# Altium PCB AMA4B_Core_board.PcbDoc (part 3 of 3)
Units mm, origin at the board's own origin, x right, y up, seen from the top; angles counter-clockwise.
Board outline 16 x 22 mm, 4 copper layers (TOP, LY2 - GND, LY3 - GND, BOTTOM), stack 0.771 mm thick; 43 components, 117 nets, 318 pads, 236 vias.
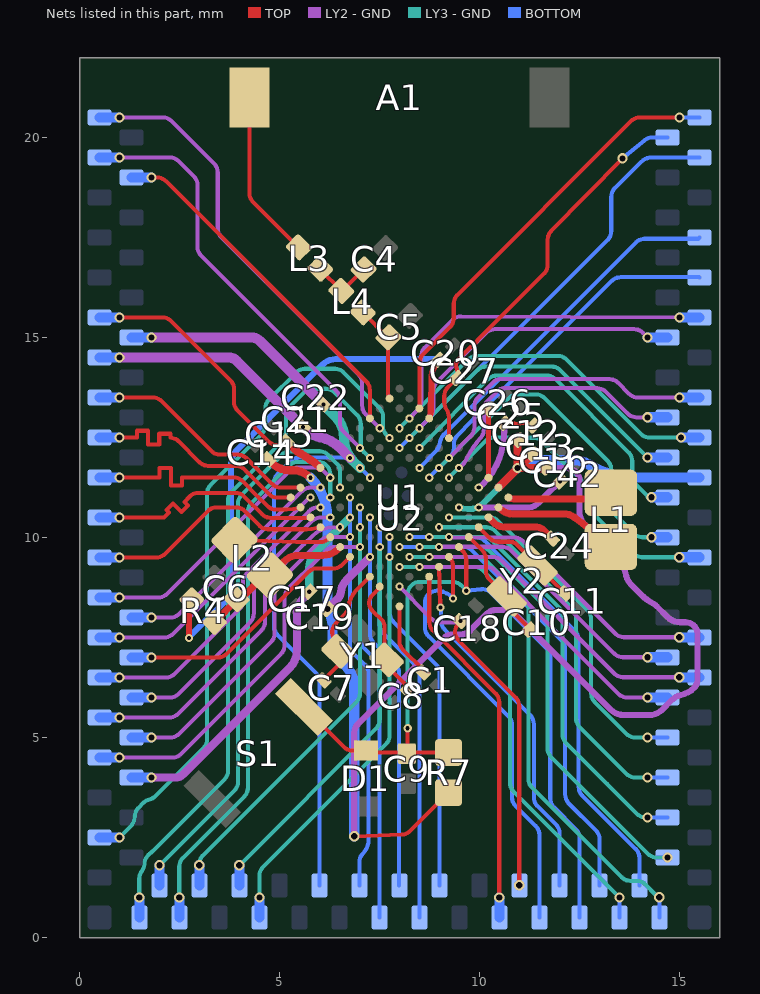
[diagram p4: the nets of this part, all layers, seen from the top]

## Via types
v1: diameter 0.254, hole 0.152, TOP to BOTTOM, tented both sides, 84 vias
v2: diameter 0.203, hole 0.102, TOP to BOTTOM, tented both sides, 84 vias
v3: diameter 0.203, hole 0.102, TOP to LY2 - GND, tented both sides, 40 vias
v4: diameter 0.203, hole 0.102, TOP to LY3 - GND, tented both sides, 28 vias

## Nets (pads, with @x,y where several pads share a name; then routed paths per layer and width w, separated by ;. In a path a pad name is that pad's centre, name@x,y a point inside that pad or via, vN(x,y) a via of type N, cw(c..) or ccw(c..) an arc to the next point about the centre after c; other vN are vias at no path point) (continued)
M6SCL_M6SCK_I2S1CK_TX23_GP61: U1.K6 U2.66 | length 17.5
  LY3 - GND w0.102: v1(1.494,1) 1.494,1.472 cw(c1.799,1.472) 1.54,1.634 1.574,1.689 ccw(c1.315,1.849) 1.619,1.829 cw(c2,1.806) 1.73,2.075 cw(c2,1.806) 1.769,2.109 ccw(c1.584,2.351) 1.796,2.133 1.799,2.135 cw(c2.011,1.917) 1.814,2.149 ccw(c1.471,2.558) 1.848,2.18 3.622,3.954 ccw(c3.406,4.169) 3.711,4.169 3.711,10.921 cw(c4.016,10.919) 3.799,11.134 4.973,12.308 ccw(c4.596,12.685) 5.026,12.369 cw(c5.27,12.187) 5.054,12.402 5.068,12.416 ccw(c4.852,12.631) 5.157,12.631 5.157,13.05 cw(c5.462,13.049) 5.246,13.265 5.611,13.629 cw(c5.826,13.414) 5.826,13.719 6.156,13.719 cw(c6.156,13.414) 6.372,13.629 6.714,13.287 6.941,13.06 cw(c6.725,12.845) 7.03,12.845 7.03,12.344 ccw(c7.335,12.344) 7.119,12.128 v4(7.258,11.99)
  BOTTOM w0.254: v1(1.494,1) 1.497,0.997 1.497,0.503 U2.66@1.5,0.5
M6SDA_M6MOSI_I2S1DAT_RX01_I2S1DOUT_GP62: U1.L6 U2.104 | length 11
  LY2 - GND w0.102: v1(1,19.5) 2.26,19.5 cw(c2.26,19.195) 2.476,19.41 2.86,19.027 cw(c2.644,18.811) 2.949,18.811 2.949,17.263 ccw(c3.254,17.263) 3.038,17.047 6.42,13.666 cw(c6.204,13.451) 6.509,13.451 6.509,13.082 6.509,12.865 ccw(c6.814,12.865) 6.598,12.649 v3(7.01,12.237)
  BOTTOM w0.254: U2.104@0.5,19.5 v1(1,19.5)
M7MISO_SWO_RTS01_GP24: U1.E2 U2.15 | length 6.8
  LY2 - GND w0.102: v3(9.485,11.742) ccw(c9.216,12.168) 9.654,11.919 ccw(c9.389,12.07) 9.671,11.954 9.68,11.977 cw(c9.962,11.861) 9.691,12.001 cw(c11.752,10.924) 9.833,12.238 cw(c12.653,10.307) 10.037,12.505 ccw(c9.803,12.701) 10.096,12.617 ccw(c9.803,12.701) 10.107,12.701 10.107,13.193 cw(c10.412,13.196) 10.197,13.412 10.436,13.651 cw(c10.65,13.434) 10.65,13.739 10.903,13.739 cw(c10.904,13.434) 10.906,13.739 12.943,13.732 cw(c12.942,13.427) 13.157,13.643 13.707,13.094 ccw(c13.922,13.31) 13.92,13.005 v1(14.2,13.005)
  BOTTOM w0.254: v1@14.205,13.005 14.695,13.005 U2.15@14.7,13
M7SCL_M7SCK_SWO_RX01_GP22: U1.F3 U2.21 | length 8.5
  LY3 - GND w0.102: v4(8.99,11.742) 10.734,13.486 cw(c10.95,13.27) 10.95,13.576 11.411,13.576 cw(c11.411,13.27) 11.628,13.486 13.206,11.908 cw(c12.99,11.693) 13.295,11.689 13.295,11.671 ccw(c13.599,11.668) 13.295,11.669 13.295,10.784 ccw(c13.599,10.786) 13.383,10.571 13.859,10.095 ccw(c14.074,10.311) 14.074,10.006 v1@14.2,10.006
  BOTTOM w0.254: v1(14.3,10.006) 14.694,10.006 U2.21@14.7,10
M7SDA_M7MOSI_SWO_RX23_GP23: U1.F2 U2.14 | length 7.7
  LY2 - GND w0.102: v3(9.237,11.99) 9.78,12.532 ccw(c9.564,12.748) 9.869,12.748 9.869,12.843 9.869,13.281 cw(c10.174,13.281) 9.958,13.497 10.34,13.879 cw(c10.556,13.663) 10.556,13.968 10.903,13.968 ; 10.904,13.968 13.248,13.96 cw(c13.247,13.655) 13.463,13.87 13.743,13.59 ccw(c13.957,13.807) 13.956,13.502 14.527,13.502 v1@14.998,13.501
  BOTTOM w0.254: v1(15,13.5) U2.14@15.5,13.5
MIPI_CLK.MIPI_N: U1.J12 U2.84 | length 6.2
  TOP w0.102: v1(1,9.5) 1.918,9.5 ccw(c1.918,9.805) 2.133,9.589 3.207,10.663 cw(c3.422,10.447) 3.422,10.752 3.916,10.752 cw(c3.916,10.447) 4.131,10.663 4.499,10.295 ccw(c4.714,10.511) 4.714,10.206 5.221,10.206 5.669,10.206 ccw(c5.671,11.409) 5.922,10.233 5.968,10.242 ccw(c5.907,10.541) U1.J12@6.02,10.258
  BOTTOM w0.254: U2.84@0.5,9.5 v1(1,9.5)
MIPI_CLK.MIPI_P: U1.K12 U2.86 | length 6.2
  TOP w0.102: v1(1,10.5) 2.041,10.5 2.102,10.5 ccw(c2.102,10.805) 2.112,10.5 2.239,10.626 2.176,10.689 2.338,10.851 2.545,10.644 2.706,10.806 2.62,10.892 2.756,11.027 cw(c2.97,10.811) 2.76,11.032 cw(c2.97,10.811) 2.97,11.116 3.9,11.116 cw(c3.9,10.811) 4.116,11.027 4.175,10.968 4.559,10.583 ccw(c4.778,10.801) 4.778,10.492 5.685,10.492 ccw(c5.685,10.798) U1.K12@5.773,10.505
  BOTTOM w0.254: U2.86@0.5,10.5 v1(1,10.5)
MIPI_D0.MIPI_N: U1.L12 U2.88 | length 6.2
  TOP w0.102: v1(1,11.5) 1.952,11.5 2.003,11.5 2.003,11.736 2.282,11.736 2.282,11.295 2.562,11.295 2.562,11.5 3.659,11.5 3.857,11.5 cw(c3.857,11.195) 4.073,11.411 4.455,11.028 4.696,10.788 ccw(c4.91,11.004) 4.91,10.7 5.172,10.7 ccw(c5.172,11.905) U1.L12@5.525,10.753
  BOTTOM w0.254: U2.88@0.5,11.5 v1(1,11.5)
MIPI_D0.MIPI_P: U1.M12 U2.90 | length 6.2
  TOP w0.102: v1(1,12.5) 1.384,12.5 1.434,12.5 1.434,12.67 1.714,12.67 1.714,12.33 1.993,12.33 1.993,12.595 2.273,12.595 2.273,12.498 2.409,12.458 cw(c2.255,12.194) 2.46,12.421 cw(c2.255,12.194) 2.471,12.411 3.001,11.881 ccw(c3.216,12.098) 3.216,11.792 3.905,11.792 cw(c3.905,11.486) 3.957,11.788 cw(c3.905,11.486) 4.122,11.702 4.181,11.643 4.626,11.198 4.627,11.197 4.746,11.078 ccw(c4.935,11.267) 4.935,11 U1.M12@5.278,11
  BOTTOM w0.254: U2.90@0.5,12.5 v1(1,12.5)
MSPI00_32KXT_RTS0_DISPD0_I2S1DIN_GP64: U1.B6 U2.26 | length 7.3
  LY2 - GND w0.102: v3(9.237,10.01) ccw(c9.318,10.304) 9.317,9.999 10.711,9.999 10.868,9.999 cw(c10.868,9.694) 11.083,9.91 13.399,7.594 ccw(c13.614,7.811) 13.612,7.506 v1(14.994,7.506)
  BOTTOM w0.254: v1(14.994,7.506) 14.997,7.503 15.497,7.503 U2.26@15.5,7.5
MSPI01_32KXT_CTS0_DISPD1_GP65: U1.A7 U2.46 | length 11
  TOP w0.102: U1.A7@9.237,9.515 9.245,9.508 cw(c9.029,9.292) 9.334,9.292 9.334,8.622 v2(9.334,8.471)
  BOTTOM w0.102: v2@9.36,8.465 ccw(c8.886,8.04) 9.264,8.552 ccw(c8.886,8.04) 8.988,8.668 ccw(c8.939,8.368) 8.634,8.369 8.634,7.922 8.634,7.748 ccw(c8.939,7.748) 8.724,7.532 10.725,5.531 cw(c10.51,5.315) 10.815,5.315 10.815,3.498 ccw(c11.119,3.5) 10.903,3.286 11.407,2.781 cw(c11.192,2.565) 11.497,2.565 11.497,0.503 U2.46@11.5,0.5
MSPI02_CKO_TX0_DISPD2_GP66: U1.A8 U2.45 | length 9.1
  TOP w0.102: U1.A8@8.99,9.268 v2@9.019,8.307 ; v2@9.019,8.306 v2@9.02,8.257
  BOTTOM w0.102: v2(9.021,8.255) 9.041,8.236 9.041,7.913 ccw(c9.345,7.913) 9.129,7.698 11.268,5.56 cw(c11.052,5.344) 11.357,5.344 11.357,3.505 ccw(c11.662,3.505) 11.446,3.29 11.911,2.824 cw(c11.695,2.609) 12,2.61 ; U2.45@12,1.3 12,2.609
MSPI03_CKO_TX2_DISPD3_GP67: U1.C6 U2.33 | length 9.9
  LY3 - GND w0.102: v4(8.99,10.258) 10.172,10.258 cw(c10.172,9.953) 10.387,10.168 10.634,9.922 12.324,8.231 cw(c12.109,8.015) 12.414,8.015 12.414,5.479 ccw(c12.719,5.48) 12.502,5.266 13.679,4.089 ccw(c13.894,4.305) 13.894,4 v1(14.2,4)
  BOTTOM w0.102: v1(14.2,4) U2.33@14.7,4
MSPI04_SWO_RX0_DISPD4_GP68: U1.B7 U2.27 | length 6.8
  LY2 - GND w0.102: v3(8.99,9.763) cw(c9.057,9.465) 9.056,9.77 10.482,9.77 10.569,9.77 cw(c10.569,9.465) 10.785,9.681 13.372,7.094 ccw(c13.586,7.311) 13.584,7.006 v1(14.2,7.006)
  BOTTOM w0.254: v1(14.2,7.006) 14.694,7.006 U2.27@14.7,7
MSPI05_32KXT_SWO_RX2_DISPD5_GP69: U1.B8 U2.28 | length 8
  LY2 - GND w0.102: v3(8.742,9.515) 10.227,9.515 10.328,9.515 cw(c10.328,9.21) 10.544,9.426 13.375,6.594 ccw(c13.59,6.811) 13.589,6.506 v1(14.994,6.506)
  BOTTOM w0.254: v1(14.994,6.506) 14.997,6.503 15.497,6.503 U2.28@15.5,6.5
MSPI06_32KXT_SWTR0_RTS0_DISPD6_GP70: U1.C5 U2.31 | length 8.9
  LY3 - GND w0.102: v4(9.237,10.505) 10.248,10.505 cw(c10.248,10.2) 10.463,10.416 10.796,10.083 12.702,8.177 cw(c12.486,7.962) 12.791,7.962 12.791,6.101 ccw(c13.096,6.103) 12.879,5.889 13.679,5.089 ccw(c13.894,5.305) 13.894,5 v1(14.2,5)
  BOTTOM w0.102: v1(14.2,5) U2.31@14.7,5
MSPI07_CKO_SWTR1_CTS0_DISPD7_GP71: U1.C7 U2.35 | length 10.7
  LY3 - GND w0.102: v4(8.742,10.01) 10.096,10.01 cw(c10.096,9.705) 10.311,9.921 10.472,9.76 11.986,8.246 cw(c11.771,8.03) 12.076,8.03 12.076,5.076 ccw(c12.38,5.078) 12.163,4.864 13.18,3.847 13.939,3.088 ccw(c14.154,3.305) 14.152,3 v1(14.2,3)
  BOTTOM w0.102: v1(14.2,3) U2.35@14.7,3
MSPI08_CKO_SWTR2_TX0_DISPD8_GP72: U1.C8 U2.37 | length 11.5
  LY3 - GND w0.102: v4(8.495,9.763) 10.02,9.763 cw(c10.02,9.458) 10.236,9.673 10.311,9.598 11.61,8.299 cw(c11.395,8.083) 11.699,8.083 11.699,4.729 ccw(c12.004,4.731) 11.787,4.517 14.215,2.089 ccw(c14.43,2.305) 14.43,2 v1(14.7,2)
MSPI09_SWTR3_TX2_DISPD9_GP73: U1.D8 U2.41 | length 12.1
  BOTTOM w0.102: v2(8.247,10.01) 9.911,10.01 cw(c9.911,9.705) 10.127,9.92 10.38,9.667 12.389,7.658 cw(c12.174,7.442) 12.479,7.442 12.479,3.762 ccw(c12.783,3.762) 12.567,3.548 13.905,2.21 13.908,2.206 cw(c13.692,1.992) 13.997,1.992 13.997,1.54 U2.41@14,1.3
MSPI10_32KXT_RX2_DISPD15_GP37: U1.F11 U2.74 | length 9.5
  LY2 - GND w0.102: v1(1,4.5) 2.336,4.5 ccw(c2.336,4.767) 2.524,4.578 5.04,7.094 ccw(c4.825,7.309) 5.13,7.309 5.13,8.506 cw(c5.434,8.506) 5.218,8.721 ; 5.218,8.721 5.962,9.465 6.172,9.675 cw(c6.387,9.459) 6.385,9.763 ; 6.387,9.763 v3@7.009,9.763
  BOTTOM w0.254: U2.74@0.5,4.5 v1(1,4.5)
  other v3: 7.01,9.763
MSPI11_SWTRCK_RTS0_DISPD16_GP38: U1.F12 U2.79 | length 6.5
  TOP w0.102: v1@1.8,7.003 3.461,7.003 ccw(c3.461,7.307) 3.676,7.091 5.72,9.136 cw(c5.936,8.92) 5.936,9.225 6.346,9.225 ccw(c6.346,9.53) 6.562,9.314 U1.F12@6.763,9.515
  BOTTOM w0.254: U2.79@1.3,7 v1(1.8,7)
MSPI20_QSPID0_RX0_DISPD10_DSPISD_GP74: U1.G11 U2.75 | length 8.2
  LY2 - GND w0.102: v1(1.8,5) 2.271,5 ccw(c2.271,5.306) 2.486,5.089 4.787,7.39 ccw(c4.572,7.605) 4.877,7.605 4.877,8.643 cw(c5.182,8.643) 4.965,8.858 5.767,9.66 cw(c5.994,9.457) 5.778,9.672 6.028,9.921 cw(c6.243,9.705) 6.241,10.01 ; 6.243,10.01 v3(6.763,10.01)
  BOTTOM w0.254: U2.75@1.3,5 v1(1.8,5)
MSPI21_QSPID1_RX2_DISPD11_DSPIDCX_GP75: U1.H11 U2.76 | length 8.6
  LY2 - GND w0.102: v1(1,5.5) 2.244,5.5 ccw(c2.244,5.805) 2.459,5.589 4.545,7.675 ccw(c4.33,7.89) 4.635,7.89 4.635,8.725 cw(c4.939,8.725) 4.723,8.94 5.605,9.822 5.819,10.036 ; 5.82,10.036 cw(c6.347,9.503) 6.496,10.238 v3(6.515,10.258)
  BOTTOM w0.254: U2.76@0.5,5.5 v1(1,5.5)
MSPI22_QSPID2_RTS0_DISPD12_GP76: U1.J11 U2.77 | length 7.4
  LY2 - GND w0.102: v1(1.8,6) 2.269,6 ccw(c2.269,6.267) 2.457,6.077 4.269,7.89 ccw(c4.054,8.105) 4.359,8.105 4.359,8.83 cw(c4.663,8.829) 4.448,9.045 5.415,10.012 cw(c5.654,9.823) 5.438,10.038 5.798,10.398 cw(c6.057,10.138) 5.799,10.399 cw(c6.057,10.138) 6.057,10.505 v3(6.268,10.505)
  BOTTOM w0.254: U2.77@1.3,6 v1(1.8,6)
MSPI23_QSPID3_CTS0_DISPD13_GP77: U1.K11 U2.78 | length 7.6
  LY2 - GND w0.102: v1(1,6.5) 2.16,6.5 ccw(c2.16,6.806) 2.375,6.589 3.999,8.213 ccw(c3.784,8.428) 4.088,8.428 4.088,8.882 cw(c4.393,8.882) 4.177,9.097 5.744,10.664 cw(c5.958,10.448) v3@5.957,10.753 ; v3@5.958,10.753 v3(6.02,10.753)
  BOTTOM w0.254: U2.78@0.5,6.5 v1(1,6.5)
MSPI24_QSPISCK_DISPD14_DSPISCK_GP78: U1.L11 U2.80 | length 6.7
  LY2 - GND w0.102: v1(1,7.5) 2.118,7.5 ccw(c2.118,7.805) 2.333,7.589 5.086,10.342 5.682,10.938 cw(c5.897,10.722) v3(5.773,11)
  BOTTOM w0.254: U2.80@0.5,7.5 v1(1,7.5)
MSPI25_SDIFD4_SWO_DISPVS_GP79: U1.M11 U2.92 | length 5.9
  TOP w0.102: v1(1,13.5) 1.832,13.5 cw(c1.832,13.195) 2.047,13.412 3.298,12.16 ccw(c3.514,12.376) 3.514,12.071 3.957,12.071 cw(c3.957,11.766) 4.173,11.982 4.79,11.364 ; 4.791,11.364 4.818,11.336 ccw(c5.033,11.552) 5.032,11.247 U1.M11@5.525,11.247
  BOTTOM w0.254: U2.92@0.5,13.5 v1(1,13.5)
MSPI26_CKO_SDIFD5_SWTR0_DISPHS_GP80: U1.K10 U2.64 | length 14.2
  LY3 - GND w0.102: v1(2.494,1) 2.494,1.777 cw(c2.8,1.776) 2.582,1.991 4.12,3.529 ccw(c3.904,3.744) 4.209,3.744 4.209,9.051 4.209,10.647 cw(c4.514,10.646) 4.297,10.86 4.432,10.995 5.238,11.801 cw(c5.452,11.585) 5.451,11.89 ; 5.452,11.89 5.963,11.89 cw(c5.963,11.585) 6.177,11.801 cw(c5.963,11.585) 6.268,11.585 v4(6.268,11)
  BOTTOM w0.254: v1(2.494,1) 2.497,0.997 2.497,0.503 U2.64@2.5,0.5
MSPI27_CKO_SDIFD6_SWTR1_DISPDE_GP81: U1.L10 U2.81 | length 6
  LY2 - GND w0.102: v1(1.8,8) 2.278,8 ccw(c2.278,8.305) 2.493,8.089 4.916,10.512 5.563,11.159 cw(c5.778,10.943) 5.778,11.247 v3(6.02,11.247)
  BOTTOM w0.254: U2.81@1.3,8 v1(1.8,8)
MSPI28_32KXT_SDIFD7_SWTR2_DISPPCK_GP82: U1.L9 U2.82 | length 7.2
  LY2 - GND w0.102: v1(1,8.5) 1.969,8.5 ccw(c1.969,8.805) 2.184,8.589 4.511,10.916 5.255,11.66 cw(c5.471,11.445) 5.471,11.749 5.887,11.749 cw(c5.887,11.445) 6.102,11.66 v3(6.268,11.495)
  BOTTOM w0.254: U2.82@0.5,8.5 v1(1,8.5)
MSPI29_32KXT_SDIFCMD_SWTR3_DISPSD_GP83: U1.K9 U2.65 | length 14.1
  LY3 - GND w0.102: v1(2,1.806) 3.872,3.679 ccw(c3.657,3.894) 3.962,3.894 3.962,10.847 cw(c4.267,10.847) 4.05,11.062 5.056,12.067 cw(c5.271,11.851) 5.271,12.156 5.999,12.156 cw(c5.999,11.851) 6.214,12.067 6.426,11.855 cw(c6.21,11.64) 6.515,11.641 ; v4(6.515,11.247) 6.515,11.64
  BOTTOM w0.254: U2.65@2,1.3 v1(2,1.806)
NetA1_1: A1.1 L3.1 | length 4.3
  TOP w0.102: A1.1@4.25,21 4.25,18.591 ccw(c4.517,18.593) 4.327,18.405 5.339,17.393 L3.1@5.53,17.202
NetC1_1: C1.1 U1.A12 | length 1.9
  TOP w0.102: U1.A12@8,8.278 8,7.427 8,7.407 ccw(c8.305,7.408) 8.088,7.194 8.089,7.193 8.585,6.697 C1.1@8.585,6.629
NetC4_1: C4.1 L3.2 L4.1 | length 1.6
  TOP w0.102: L3.2@6.015,16.717 6.015,16.706 6.546,16.175 L4.1@6.546,16.164 6.566,16.164 C4.1@7.103,16.701
NetC5_1: C5.1 L4.2 U1.M2 | length 2.4
  TOP w0.102: L4.2@7.081,15.628 7.705,15.004 C5.1@7.725,15.004 7.712,14.809 ccw(c8.016,14.787) 7.711,14.787 7.711,14.284 7.711,13.63 ccw(c8.016,13.631) U1.M2@7.753,13.476
NetC7_1: C7.1 U1.D12 Y1.1 | length 3.1
  TOP w0.102: C7.1@6.099,6.429 6.099,6.433 6.48,6.814 6.48,7.151 Y1.1@6.475,7.156 6.372,7.466 6.369,7.468 cw(c6.622,7.639) 6.405,7.854 6.634,8.083 ccw(c6.418,8.297) 6.72,8.257 ; 6.72,8.258 cw(c7.478,8.159) 6.843,8.585 cw(c7.478,8.159) 6.937,8.699 U1.D12@7.258,9.02
NetC8_1: C8.1 U1.C12 Y1.3 | length 3
  TOP w0.102: U1.C12@7.505,8.773 7.505,8.743 7.317,8.554 ccw(c7.505,8.366) 7.316,8.178 7.584,7.91 ; 7.584,7.91 cw(c7.356,7.772) 7.62,7.807 cw(c7.356,7.772) 7.623,7.772 7.623,7.304 7.624,7.304 Y1.3@7.677,6.943 7.677,6.798 8.211,6.264 C8.1@8.211,6.223
NetC10_1: C10.1 U1.A5 Y2.1 | length 2.9
  TOP w0.102: U1.A5@9.732,10.01 10.072,9.67 cw(c9.86,9.458) 10.16,9.458 10.16,9.448 10.16,9.168 ccw(c10.46,9.168) 10.247,8.957 ; 10.248,8.956 Y2.1@10.676,8.527 10.676,8.302 11.248,7.73 C10.1@11.248,7.7
NetC11_1: C11.1 U1.A4 Y2.2 | length 2.8
  TOP w0.102: U1.A4@9.98,10.258 10.265,9.973 ccw(c10.453,10.162) 10.452,9.895 10.607,9.895 10.75,9.895 cw(c10.75,9.628) 10.939,9.817 11.143,9.613 Y2.2@11.452,9.303 11.452,9.285 C11.1@12.136,8.601
NetL2_1: L2.1 U1.H12 | length 2.4
  TOP w0.102: L2.1@3.876,9.939 4.318,9.927 ccw(c4.362,10.177) 4.352,9.923 5.419,9.888 5.54,9.888 6.019,9.888 ccw(c6.019,10.193) 6.235,9.977 U1.H12@6.268,10.01
nRST: C9.1 D1.1 R7.1 S1.1 U1.A6 U2.44 | length 20.6
  TOP w0.102: S1.1@5.614,5.76 6.276,5.098 6.612,4.762 ccw(c6.827,4.978) 6.827,4.673 D1.1@7.16,4.673 7.206,4.627 C9.1@8.204,4.627 ; C9.1@8.18,4.599 8.204,4.623 C9.1@8.204,4.627 ; v4(8.204,5.232) C9.1@8.204,4.627 ; R7.1@9.225,4.627 C9.1@8.204,4.627 ; U1.A6@9.485,9.763 9.58,9.668 cw(c9.364,9.452) 9.669,9.452 v2(9.669,8.669)
  LY3 - GND w0.102: v4(8.204,5.232) 8.204,8.586 cw(c8.509,8.585) 8.508,8.889 9.333,8.889 cw(c9.333,8.585) 9.53,8.818 cw(c9.333,8.585) 9.549,8.8 9.626,8.723 cw(c9.411,8.507) v2(9.669,8.669)
  BOTTOM w0.102: v2(9.669,8.669) 10.044,8.707 cw(c10.075,8.404) 10.29,8.619 11.679,7.23 cw(c11.463,7.015) 11.768,7.015 11.768,3.473 ccw(c12.073,3.474) 11.856,3.26 12.411,2.706 cw(c12.195,2.49) 12.5,2.49 U2.44@12.5,0.5
PDM0CK_SWTRCK_RTS23_TE_GP50: U1.A9 U2.48 | length 9.2
  TOP w0.102: U1.A9@8.742,9.02 8.742,8.03 8.742,7.889 ccw(c9.047,7.89) 8.831,7.676 8.832,7.675 10.405,6.102 cw(c10.189,5.886) 10.494,5.886 v1(10.494,1)
  BOTTOM w0.254: v1(10.494,1) 10.497,0.997 10.497,0.503 U2.48@10.5,0.5
PDM0DAT_SWTR0_CTS01_GP51: U1.B9 U2.29 | length 7.5
  LY2 - GND w0.102: v3(8.495,9.268) 9.98,9.268 10.173,9.268 cw(c10.173,8.963) 10.389,9.178 13.479,6.088 ccw(c13.694,6.305) 13.692,6 v1(14.2,6)
  BOTTOM w0.254: v1(14.2,6) U2.29@14.7,6
PDM1CK_SWTR1_CTS23_VCO_GP52: U1.C10 U2.42 | length 12.2
  LY3 - GND w0.102: v4(8,9.268) 9.869,9.268 cw(c9.869,8.963) 9.964,9.252 cw(c9.869,8.963) 10.084,9.178 10.675,8.587 cw(c10.46,8.371) 10.765,8.371 10.765,3.86 ccw(c11.07,3.861) 10.853,3.647 v1(13.5,1)
  BOTTOM w0.102: U2.42@13.5,0.5 v1(13.5,1)
PDM1DAT_SWTR2_TX01_GP53: U1.C9 U2.40 | length 12.9
  LY3 - GND w0.102: v4(8.247,9.515) 9.944,9.515 cw(c9.944,9.21) 10.142,9.443 10.149,9.436 cw(c9.995,9.268) 10.156,9.429 11.133,8.453 cw(c10.917,8.237) 11.222,8.237 11.222,3.966 ccw(c11.527,3.966) 11.311,3.751 13.556,1.506 ccw(c13.771,1.722) 13.771,1.417 13.929,1.417 cw(c13.929,1.113) 14.144,1.329 14.406,1.067 ccw(c14.62,1.284) v1(14.494,1.006)
  BOTTOM w0.102: v1(14.494,1.006) 14.497,1.003 14.497,0.503 U2.40@14.5,0.5
PDM2CK_SWTR3_TX23_GP54: U1.D10 U2.60 | length 10.3
  LY3 - GND w0.102: v1(4.5,1) 4.5,1.548 cw(c4.806,1.547) 4.588,1.762 7.664,4.837 ccw(c7.447,5.053) 7.753,5.053 7.753,7.675 v4(7.753,9.515)
  BOTTOM w0.254: U2.60@4.5,0.5 v1(4.5,1)
PDM2DAT_SWTRCTL_RX01_GP55: U1.D9 U2.43 | length 11.5
  BOTTOM w0.102: v2(8,9.763) 9.61,9.763 cw(c9.61,9.496) 9.799,9.684 10.098,9.386 12.064,7.419 cw(c11.875,7.231) 12.142,7.231 12.142,3.57 ccw(c12.447,3.57) 12.231,3.355 12.911,2.674 cw(c12.695,2.46) 13,2.461 ; U2.43@13,1.3 13,2.46
PDM3CK_SWO_RX23_GP56: U1.E10 U2.61 | length 9.9
  LY3 - GND w0.102: v1(3.994,1.806) 7.416,5.229 ccw(c7.199,5.444) 7.505,5.444 7.505,7.922 v4(7.505,9.763)
  BOTTOM w0.254: v1(3.994,1.806) 3.997,1.803 3.997,1.303 U2.61@4,1.3
PDM3DAT_SWO_RTS01_VCO_GP57: U1.E9 U2.51 | length 9.2
  BOTTOM w0.102: v2(7.753,10.01) 7.753,8.114 ccw(c8.057,8.116) 7.841,7.901 8.227,7.515 8.911,6.831 cw(c8.695,6.616) 9,6.616 U2.51@9,1.3
RTS03_GP58: U1.J7 U2.57 | length 13.4
  BOTTOM w0.102: U2.57@6,1.3 6,6.413 ccw(c5.733,6.413) 5.922,6.601 4.942,7.581 4.94,7.583 cw(c5.13,7.77) 4.864,7.768 4.864,11.371 4.864,11.373 cw(c5.168,11.371) 4.873,11.446 cw(c5.168,11.371) 4.952,11.586 5.273,11.907 cw(c5.488,11.691) 5.414,11.987 cw(c5.488,11.691) 5.488,11.996 6.63,11.996 cw(c6.63,11.691) 6.846,11.907 v2(7.258,11.495)
SDIFCK0_GP88: U1.F9 U2.52 | length 10.1
  BOTTOM w0.102: v2(7.505,10.258) 7.505,7.922 7.505,7.801 ccw(c7.772,7.802) 7.582,7.615 7.583,7.614 8.422,6.775 cw(c8.233,6.587) 8.5,6.587 U2.52@8.5,0.5
SDIFD0_GP84: U1.J9 U2.55 | length 9.9
  BOTTOM w0.102: v2(6.763,11) 6.763,8.665 6.763,7.318 ccw(c7.067,7.319) 6.851,7.104 7.139,6.817 cw(c6.923,6.601) 7.228,6.601 7.228,2.449 cw(c6.739,2.449) 7.085,2.103 ccw(c7.305,1.892) 7,1.892 U2.55@7,1.3
SDIFD1_GP85: U1.H9 U2.54 | length 10.4
  BOTTOM w0.102: v2(7.01,10.753) 7.01,8.417 7.01,7.469 ccw(c7.315,7.469) 7.099,7.254 7.414,6.938 cw(c7.198,6.723) 7.503,6.723 U2.54@7.503,0.5
SDIFD2_GP86: U1.G10 U2.63 | length 10.6
  LY3 - GND w0.102: v1(2.994,1.806) 2.994,1.839 cw(c3.3,1.837) 3.082,2.053 6.921,5.892 ccw(c6.704,6.107) 7.01,6.107 7.01,8.417 v4(7.01,10.258)
  BOTTOM w0.254: v1(2.994,1.806) 2.997,1.803 2.997,1.303 U2.63@3,1.3
SDIFD3_TE_GP87: U1.G9 U2.53 | length 9.5
  BOTTOM w0.102: v2(7.258,10.505) 7.258,8.17 7.258,7.595 ccw(c7.562,7.595) 7.347,7.38 7.906,6.821 cw(c7.717,6.633) 7.984,6.633 U2.53@7.984,1.3
SIMOSW: L1.1 U1.A1 | length 2.6
  TOP w0.178: U1.A1@10.722,11 ccw(c10.91,11.417) 10.909,10.96 11.672,10.96 12.935,10.96 ccw(c12.935,11.417) 13.258,11.093 L1.1@13.283,11.118
SIMOSWSEL: L1.2 U1.A2 | length 3.1
  TOP w0.178: U1.A2@10.475,10.753 10.504,10.724 10.505,10.723 ccw(c10.827,11.047) 10.827,10.59 11.302,10.59 12.107,10.59 cw(c12.106,10.133) 12.369,10.506 cw(c8.382,4.897) 12.767,10.201 ccw(c12.944,10.417) 12.774,10.195 12.774,10.199 L1.2@13.283,9.766
SWDCK_TX01_GP20: U1.K3 U2.16 | length 9.1
  LY3 - GND w0.102: v4(8,12.732) 8.99,13.722 9.715,14.448 cw(c9.932,14.231) 9.932,14.537 11.963,14.537 cw(c11.963,14.231) 12.179,14.448 14.041,12.586 ccw(c14.257,12.803) 14.255,12.497 v1(15.037,12.497)
  BOTTOM w0.254: v1(15.037,12.497) 15.038,12.498 U2.16@15.5,12.5 U2.16@15.5,12.5
SWDIO_TX23_GP21: U1.J3 U2.17 | length 8.1
  LY3 - GND w0.102: v4(8.247,12.485) 9.237,13.475 9.946,14.183 cw(c10.162,13.967) 10.162,14.273 10.346,14.273 ccw(c10.345,14.579) 10.376,14.275 cw(c10.433,13.743) 10.433,14.278 11.677,14.278 cw(c11.678,13.743) 11.735,14.274 ccw(c11.766,14.579) 11.765,14.273 11.8,14.273 cw(c11.8,13.967) 12.017,14.183 v1(14.2,12)
  BOTTOM w0.254: v1(14.2,12) U2.17@14.7,12
SWO_VCO_IS20CK_DSPTDO_GP28: U1.E3 U2.22 | length 8.2
  LY3 - GND w0.102: v4(9.237,11.495) 10.152,12.41 cw(c10.367,12.194) 10.241,12.471 cw(c10.367,12.194) 10.367,12.498 11.146,12.498 cw(c11.147,11.863) 11.15,12.498 cw(c11.147,11.863) 11.209,12.495 ccw(c11.238,12.799) 11.237,12.494 11.353,12.494 cw(c11.353,12.189) 11.568,12.405 ; 11.568,12.405 12.601,11.372 cw(c12.385,11.156) 12.691,11.156 12.691,10.881 ccw(c12.996,10.883) 12.779,10.669 13.854,9.594 ccw(c14.068,9.811) 14.066,9.506 v1(14.994,9.506)
  BOTTOM w0.254: v1(14.994,9.506) 15.494,9.506 U2.22@15.5,9.5
TRC0_SSDA_SMOSI_TX23_VCO_GP1: U1.J4 U2.2 | length 11.1
  BOTTOM w0.102: v2(8,12.237) 9.237,13.475 13.204,17.441 ccw(c12.988,17.657) 13.293,17.657 13.293,18.52 cw(c13.598,18.519) 13.381,18.733 14.035,19.387 ; 14.036,19.387 cw(c14.31,19.11) 14.31,19.5 U2.2@15.5,19.5
TRC1_SMISO_TRIG1_RX01_VCO_GP2: U1.K4 U2.70 | length 17.3
  LY3 - GND w0.102: v1(1,2.5) 1.272,2.772 ccw(c1.009,3.034) 1.38,3.027 cw(c1.686,3.019) 1.469,3.235 1.604,3.37 cw(c1.82,3.153) 1.748,3.451 ; 1.749,3.451 ccw(c1.677,3.747) 1.891,3.53 3.101,4.74 ccw(c2.885,4.956) 3.19,4.956 3.19,11.103 cw(c3.495,11.101) 3.278,11.316 4.556,12.593 ccw(c4.34,12.808) 4.645,12.808 4.645,13.23 cw(c4.949,13.229) 4.734,13.445 5.419,14.13 cw(c5.634,13.914) 5.634,14.219 6.385,14.219 cw(c6.385,13.914) 6.601,14.13 7.079,13.651 7.497,13.234 cw(c7.281,13.018) 7.586,13.018 7.586,12.778 ccw(c7.891,12.778) 7.675,12.562 v4(7.753,12.485)
  BOTTOM w0.254: U2.70@0.5,2.5 v1(1,2.5)
TRC2_SCEn_SWO_RX23_GP3: U1.L4 U2.106 | length 11.6
  LY2 - GND w0.102: v1(1,20.5) 2.087,20.5 cw(c2.087,20.195) 2.303,20.41 3.367,19.347 cw(c3.151,19.131) 3.456,19.131 3.456,17.721 ccw(c3.761,17.721) 3.545,17.505 6.977,14.074 cw(c6.761,13.858) 7.066,13.858 7.066,13.639 7.066,13.297 ccw(c7.371,13.298) 7.154,13.083 7.155,13.082 v3(7.505,12.732)
  BOTTOM w0.254: U2.106@0.5,20.5 v1(1,20.5)
TRC3_SINT_32KXT_RTS01_I2S0DIN_GP4: U1.M4 U2.103 | length 8.9
  TOP w0.102: v1(1.8,19) 1.942,19 cw(c1.942,18.695) 2.156,18.912 7.168,13.9 cw(c6.953,13.684) 7.233,13.805 cw(c6.953,13.684) 7.258,13.684 U1.M4@7.258,12.98
  BOTTOM w0.254: U2.103@1.3,19 v1(1.8,19)
TRCLK_SSCL_SSCK_TX01_VCO_GP0: U1.H3 U2.19 | length 8.4
  LY3 - GND w0.102: v4(8.495,12.237) 10.216,13.959 cw(c10.433,13.743) 10.433,14.049 11.679,14.049 cw(c11.679,13.744) 11.894,13.961 13.728,12.126 cw(c13.513,11.91) 13.818,11.91 13.818,11.542 ccw(c14.122,11.542) 13.907,11.327 14.2,11.033 v1@14.2,11.006
  BOTTOM w0.254: v1(14.3,11.006) 14.694,11.006 U2.19@14.7,11
TRIG0_VCO_I2S0DAT_CTS1_DSPTRSTN_I2S0DOUT_GP29: U1.F4 U2.8 | length 9
  BOTTOM w0.102: v2(8.742,11.495) 9.271,12.024 ccw(c9.055,12.239) 9.36,12.239 9.36,12.338 cw(c9.665,12.338) 9.448,12.553 9.804,12.908 13.316,16.421 cw(c13.531,16.204) 13.531,16.509 15.029,16.509 15.491,16.509 U2.8@15.5,16.5
TRIG1_VCO_I2S0WS_TX0_DSPTDI_GP30: U1.G4 U2.6 | length 9.5
  BOTTOM w0.102: v2(8.495,11.742) 8.914,12.161 ccw(c8.698,12.376) 8.998,12.321 ; 8.998,12.321 cw(c9.421,12.288) 9.118,12.585 cw(c9.335,12.372) 9.119,12.586 9.623,13.09 13.913,17.38 cw(c14.128,17.164) 14.128,17.469 14.921,17.469 15.469,17.469 U2.6@15.5,17.5
TXEN: U1.K1 U2.0 | length 11.1
  TOP w0.102: U1.K1@8.495,13.227 8.495,14.217 8.495,14.364 cw(c8.8,14.364) 8.584,14.579 9.267,15.262 ccw(c9.051,15.477) 9.356,15.477 9.356,15.851 cw(c9.661,15.85) 9.445,16.066 13.79,20.411 cw(c14.006,20.195) 14.006,20.5 v1(15,20.5) v1@15.025,20.5
  BOTTOM w0.102: v1(15,20.5) U2.0@15.5,20.5
VCO_GP90: U1.J2 U2.11 | length 7.7
  LY2 - GND w0.102: v3(8.495,12.732) 8.755,12.992 ccw(c8.539,13.208) 8.844,13.208 8.844,13.67 cw(c9.149,13.669) 8.887,13.825 cw(c9.149,13.669) 8.932,13.884 10.169,15.121 cw(c10.384,14.904) 10.384,15.209 13.865,15.209 cw(c13.865,14.904) 14.08,15.12 v1(14.2,15)
  BOTTOM w0.254: v1(14.2,15) U2.11@14.7,15
VCO_GP91: U1.K2 U2.10 | length 9.1
  LY2 - GND w0.102: v3(8.247,12.98) 8.453,13.186 ccw(c8.238,13.401) 8.543,13.401 8.543,14.17 8.543,14.539 cw(c8.847,14.538) 8.632,14.753 9.321,15.442 cw(c9.536,15.226) 9.537,15.531 v1(15,15.5)
  BOTTOM w0.254: v1(15,15.5) U2.10@15.5,15.5
VDD18: C17.1 U1.H10 U2.73 | length 9.4
  LY2 - GND w0.203: v1(1.8,4) 2.399,4 ccw(c2.399,4.267) 2.587,4.077 5.258,6.748 ccw(c4.827,7.179) 5.437,7.179 5.437,7.789 ccw(c4.827,7.787) 5.435,7.825 cw(c5.841,7.852) 5.435,7.879 ccw(c4.827,7.917) 5.437,7.915 5.437,8.078 cw(c6.046,8.078) 5.603,8.497 v2(5.743,8.644)
  LY3 - GND w0.203: v2(5.743,8.644) 5.743,9.234 cw(c6.352,9.233) 5.85,9.578 cw(c6.352,9.233) 5.92,9.662 v4(6.763,10.505)
  BOTTOM w0.254: U2.73@1.3,4 v1(1.8,4)
VDD_MCU: C12.1 C13.1 C14.1 C15.1 C16.1 C19.1 R7.2 U1.B1 U1.C4 U1.E11 U1.M9 U1.M10 U2.18 U2.96 | length 53.4
  TOP w0.102: v1(1,15.5) 2.08,15.5 cw(c2.08,15.2) 2.292,15.412 3.774,13.93 cw(c3.562,13.717) 3.862,13.717 3.862,13.388 ccw(c4.167,13.39) 3.95,13.175 4.723,12.403 ccw(c4.937,12.619) 4.935,12.315 C15.1@5.181,12.315 ; v1(6.869,2.531) 8.061,2.574 ccw(c8.05,2.879) 8.266,2.663 R7.2@9.225,3.622
  TOP w0.203: C14.1@4.718,11.958 4.817,11.859 ccw(c5.248,12.29) 5.121,11.694 ccw(c5.248,12.29) 5.248,11.68 5.335,11.68 cw(c5.335,11.071) 5.766,11.502 v2(5.773,11.495) ; C15.1@5.181,12.396 5.236,12.345 5.25,12.331 ccw(c5.68,12.763) 5.258,12.323 5.395,12.192 ccw(c5.815,12.634) 5.488,12.12 5.49,12.119 5.524,12.097 5.743,11.958 5.746,11.957 ccw(c6.069,12.474) 5.789,11.932 cw(c5.51,11.39) U1.M9@6.012,11.737 ; U1.B1@10.475,11.247 10.888,11.661 ccw(c10.51,12.037) v1(10.95,11.735) 11.524,11.735 cw(c11.523,11.482) 11.55,11.733 C16.1@11.678,11.747 ; v1(10.95,11.735) 10.967,11.745 11.003,11.767 ccw(c10.823,12.007) 11.035,11.795 C13.1@11.333,12.092 ; v1@10.95,11.795 10.95,12.292 cw(c11.25,12.292) 10.986,12.436 C12.1@10.988,12.438
  LY2 - GND w0.152: v1(6.869,2.531) 6.869,5.119 cw(c7.174,5.118) 6.957,5.332 9.114,7.489 cw(c9.33,7.273) 9.33,7.578 9.54,7.578 ccw(c9.54,7.883) 9.756,7.667 10.184,8.096 cw(c10.4,7.881) 10.4,8.185 10.664,8.185 cw(c10.664,7.881) 10.879,8.096 13.279,5.696 ccw(c13.603,6.019) 13.601,5.562 14.245,5.562 ccw(c14.245,6.019) 14.567,5.695 14.812,5.94 cw(c15.134,5.616) 15.034,6.062 ; v1(10.95,11.735) 12.193,11.735 cw(c12.193,11.43) 12.498,11.43 12.498,10.645 ccw(c12.955,10.645) 12.631,10.323 13.491,9.462 cw(c13.167,9.14) 13.61,9.255 13.667,9.035 ccw(c14.11,9.15) 13.785,8.828 14.095,8.518 ccw(c14.417,8.843) 14.171,8.458 14.36,8.337 cw(c14.114,7.952) 14.437,8.275 14.696,8.016 ccw(c15.019,8.339) 15.019,7.882 15.149,7.882 cw(c15.149,7.578) 15.454,7.578 15.454,6.458 cw(c15.149,6.458) 15.365,6.243 cw(c14.889,6.718) 15.035,6.062
  LY2 - GND w0.203: v1(6.2,8.212) 6.448,8.459 ccw(c6.236,8.672) 6.535,8.643 cw(c6.99,8.601) 6.595,8.832 cw(c6.99,8.601) 6.667,8.924 v3(7.258,9.515)
  LY3 - GND w0.152: v4(9.485,10.753) ccw(c9.944,12.682) 9.7,10.714 9.702,10.713 ccw(c9.756,11.167) 10.085,10.849 v1(10.95,11.735)
  BOTTOM w0.254: U2.96@0.5,15.5 v1(1,15.5) ; v2(5.773,11.495) cw(c4.739,10.462) 6.2,10.462 v1(6.2,8.212) cw(c5.56,7.798) 6.322,7.798 6.322,7.441 ccw(c7.084,7.441) 6.545,6.903 6.647,6.801 ; 6.647,6.801 cw(c6.107,6.263) 6.869,6.265 6.869,6.263 v1(6.869,2.531) ; v1@10.953,11.732 cw(c11.372,11.392) 10.965,11.747 cw(c11.372,11.392) 11.372,11.932 12.342,11.932 cw(c12.344,11.17) 12.743,11.82 ccw(c13.864,13.648) 13.864,11.503 15.32,11.503 cw(c15.32,10.741) 15.334,11.503 U2.18@15.5,11.5
VDDAUDA: C18.1 U1.B11 U2.47 | length 9.2
  TOP w0.102: v2(9.52,7.911) 9.471,7.845 ccw(c9.695,7.639) 9.479,7.424 10.904,5.999 cw(c10.689,5.783) 10.994,5.783 v1@10.994,1.281
  LY2 - GND w0.102: v3(8,8.773) 8.742,8.03 8.818,7.954 ccw(c9.027,8.17) 9.025,7.87 9.369,7.87 ccw(c9.369,8.17) v2(9.52,7.911)
  other v1: 10.994,1.306
VDDB: C27.1 U1.G1 U2.1 | length 10.1
  TOP w0.102: U1.G1@9.237,12.485 9.234,12.489 9.234,13.017 ccw(c8.929,13.017) 9.197,13.162 9.155,13.241 cw(c9.423,13.385) 9.119,13.385 9.119,13.542 cw(c9.423,13.542) 9.122,13.59 cw(c9.423,13.542) 9.207,13.757 9.468,14.018 9.468,14.132 cw(c9.731,14.287) 9.44,14.196 9.423,14.25 cw(c9.624,14.313) 9.475,14.462 9.749,14.736 cw(c9.964,14.52) 9.808,14.782 ccw(c9.627,15.088) 9.933,14.907 cw(c10.195,14.751) 9.978,14.965 11.616,16.603 ccw(c11.399,16.817) 11.704,16.817 11.704,17.448 cw(c12.009,17.447) 11.791,17.661 v1(13.572,19.48)
  BOTTOM w0.102: v1(13.572,19.48) 14.131,19.934 cw(c14.319,19.7) 14.318,20 ; 14.319,20 U2.1@14.7,20
VDDBH: C6.1 L2.2 R4.2 U1.G12 | length 4.3
  TOP w0.178: R4.2@3.374,7.88 3.928,8.434 C6.1@3.928,8.459 4.023,8.459 4.585,9.02 ccw(c4.225,9.414) 4.679,9.135 4.534,9.28 L2.2@4.761,9.054 ; L2.2@4.79,9.083 5.105,9.398 cw(c5.481,9.02) 5.481,9.553 6.085,9.553 ccw(c6.085,10.086) 6.462,9.709 U1.G12@6.515,9.763
VDDBH_RF: C20.1 R4.1 U1.J1 | length 13.6
  TOP w0.152: v2(2.735,7.488) 2.735,8.206 cw(c3.014,8.204) 2.746,8.282 R4.1@2.805,8.449 ; U1.J1@8.743,12.981 ccw(c8.325,13.165) 8.782,13.165 8.782,13.336 cw(c9.239,13.336) 8.782,13.351 8.8,13.912 8.805,14.048 cw(c9.262,14.033) 8.828,14.177 cw(c9.262,14.033) 8.883,14.288 8.937,14.342 C20.1@8.98,14.442 v2(8.973,14.449)
  BOTTOM w0.152: v2@2.735,7.503 3.656,8.425 ccw(c3.333,8.748) 3.79,8.748 3.79,11.846 cw(c4.248,11.846) 3.924,12.168 6.082,14.327 cw(c6.405,14.003) 6.403,14.46 6.405,14.46 7.887,14.46 8.253,14.46 v2@8.962,14.46
VDDC: C24.1 U1.A3 | length 1.8
  TOP w0.178: U1.A3@10.227,10.505 10.378,10.355 ; 10.378,10.354 ccw(c10.59,10.567) 10.59,10.267 10.979,10.267 11.392,10.267 cw(c11.392,9.967) 11.604,10.179 11.722,10.061 C24.1@11.812,9.971
VDDC_LV: C42.1 U1.B3 | length 2.3
  LY2 - GND w0.152: v3@9.987,10.746 11.238,10.746 ccw(c11.159,11.196) 11.481,10.871 11.661,11.051 v2(12.014,11.405)
  other v3: 9.98,10.753
VDDF: C12.2 C25.1 U1.C2 | length 2.6
  TOP w0.102: C25.1@10.649,12.892 v2(10.617,12.859) 10.763,12.892 10.849,12.859 cw(c10.74,12.574) 10.861,12.854 ccw(c10.944,13.047) 11.019,12.85 cw(c11.124,12.564) 11.249,12.842 cw(c10.109,10.323) C12.2@11.346,12.796
  LY2 - GND w0.152: v3@9.981,11.248 ccw(c9.744,11.639) 10.066,11.314 ccw(c8.742,12.643) 10.554,12.158 ccw(c8.742,12.643) 10.617,12.693 cw(c11.074,12.702) 10.617,12.699 v2(10.617,12.859)
  other v3: 9.98,11.247
VDDS: C26.1 U1.C1 | length 1.7
  TOP w0.127: U1.C1@10.222,11.5 10.222,12.49 10.222,12.96 cw(c10.603,12.96) 10.234,13.053 C26.1@10.272,13.205
VDDUSB0P9: C21.1 U1.L7 U2.94 | length 7.2
  LY2 - GND w0.254: v1(1,14.5) 3.723,14.5 cw(c3.723,14.2) 3.935,14.412 v2(5.584,12.762) v2@5.632,12.715 ; v2@5.633,12.714 ccw(c6.171,13.253) 5.951,12.524 ccw(c6.171,13.253) 6.015,12.507 cw(c5.82,11.548) 6.51,12.242 ; 6.511,12.241 v3(6.763,11.99)
  BOTTOM w0.254: U2.94@0.5,14.5 v1(1,14.5)
VDDUSB33: C22.1 U1.K7 U2.95 | length 7.4
  LY2 - GND w0.254: v1(1.8,15) 4.299,15 cw(c4.299,14.694) 4.516,14.91 v2(6.096,13.331)
  LY3 - GND w0.254: v2(6.096,13.331) 6.392,13.034 cw(c5.853,12.495) 6.426,12.998 cw(c5.853,12.495) 6.615,12.495 6.615,12.453 ccw(c7.377,12.453) 6.838,11.915 v4(7.01,11.742)
  BOTTOM w0.254: U2.95@1.3,15 v1(1.8,15)
pads on no net: A1.NC U1.K8

## Polygon pours and split planes (outlines as drawn)
GND on TOP "GND_L01_P005" (solid, remove dead copper, pour order 5): 16,0 0,0 0,22 16,22
VDD_MCU on TOP "NONET_L-01_P-001" (solid, pour order 4): 10.51,11.823 11.107,11.227 11.344,11.227 11.904,11.787 11.904,11.881 11.143,12.642 11.007,12.642 10.51,12.146
VDD_MCU on TOP "NONET_L-01_P-001" (solid, remove dead copper, pour order 3): 4.523,12.014 5.129,12.62 5.287,12.62 5.908,11.999 5.376,11.467 5.023,11.467 4.523,11.967
GND on LY2 - GND "GND_L02_P000" (solid, remove dead copper, pour order 0): 16,0 0,0 0,22 16,22
GND on LY3 - GND "GND_L03_P001" (solid, remove dead copper, pour order 1): 16,0 0,0 0,22 16,22
GND on BOTTOM "GND_L04_P002" (solid, remove dead copper, pour order 2): 16,0 0,0 0,22 16,22

## Other copper
TOP:
  pour cut-out: 0,22 16,22 16,19.863 0,19.863
LY2 - GND:
  pour cut-out: 0,22 16,22 16,19.863 0,19.863
LY3 - GND:
  pour cut-out: 0,22 16,22 16,19.863 0,19.863
BOTTOM:
  pour cut-out: 0,22 16,22 16,19.863 0,19.863

## Silkscreen, mask and mechanical layers (free items; w line width, h text height)
Bottom Overlay:
  lines w0.15: 15.265,20.98 15.697,20.98
Top Solder:
  lines w0.4: 0.198,0.189 0.198,2.189 0.298,2.189 0.298,0.189 0.198,0.189 ; 0.209,17.05 0.209,19.05 0.309,19.05 0.309,17.05 0.209,17.05 ; 0.211,0.186 2.211,0.186 2.211,0.286 0.211,0.286 0.211,0.186 ; 0.22,18.952 1.22,18.952 1.22,19.052 0.22,19.052 0.22,18.952 ; 13.787,0.198 15.787,0.198 15.787,0.298 13.787,0.298 13.787,0.198 ; 14.752,18.939 15.752,18.939 15.752,19.039 14.752,19.039 14.752,18.939 ; 15.653,17.038 15.653,19.038 15.753,19.038 15.753,17.038 15.653,17.038 ; 15.69,0.211 15.69,2.211 15.79,2.211 15.79,0.211 15.69,0.211
Top Assembly:
Board Shape:
  lines w0.025: 17,-3.873 ccw(c17.127,-3.873) 17.127,-4
  lines w0.05: 0,0 16,0 16,22 0,22 0,0

## Dimensions
16,0 to 16,22 on Dimensions
0,0 to 16,0 on Dimensions

## Text inside footprints (layer, text, board x,y; h text height)
TP1: Bottom Assembly "Test point. DNP." at 6.318,11.227 h0.25 r270
TP2: Bottom Assembly "Test point. DNP." at 7.004,10.922 h0.25 r270
TP3: Bottom Assembly "Test point. DNP." at 7.995,11.1 h0.25 r270
TP4: Bottom Assembly "Test point. DNP." at 7.587,10.786 h0.25 r270
Y2: Top Assembly "2" at 11.816,9.294 h0.5 r45; Top Assembly "1" at 10.592,7.75 h0.5 r45